# EAGLE board AS726x Spectral Sensor Panel (EAGLE 7.7.0), part 1 of 2
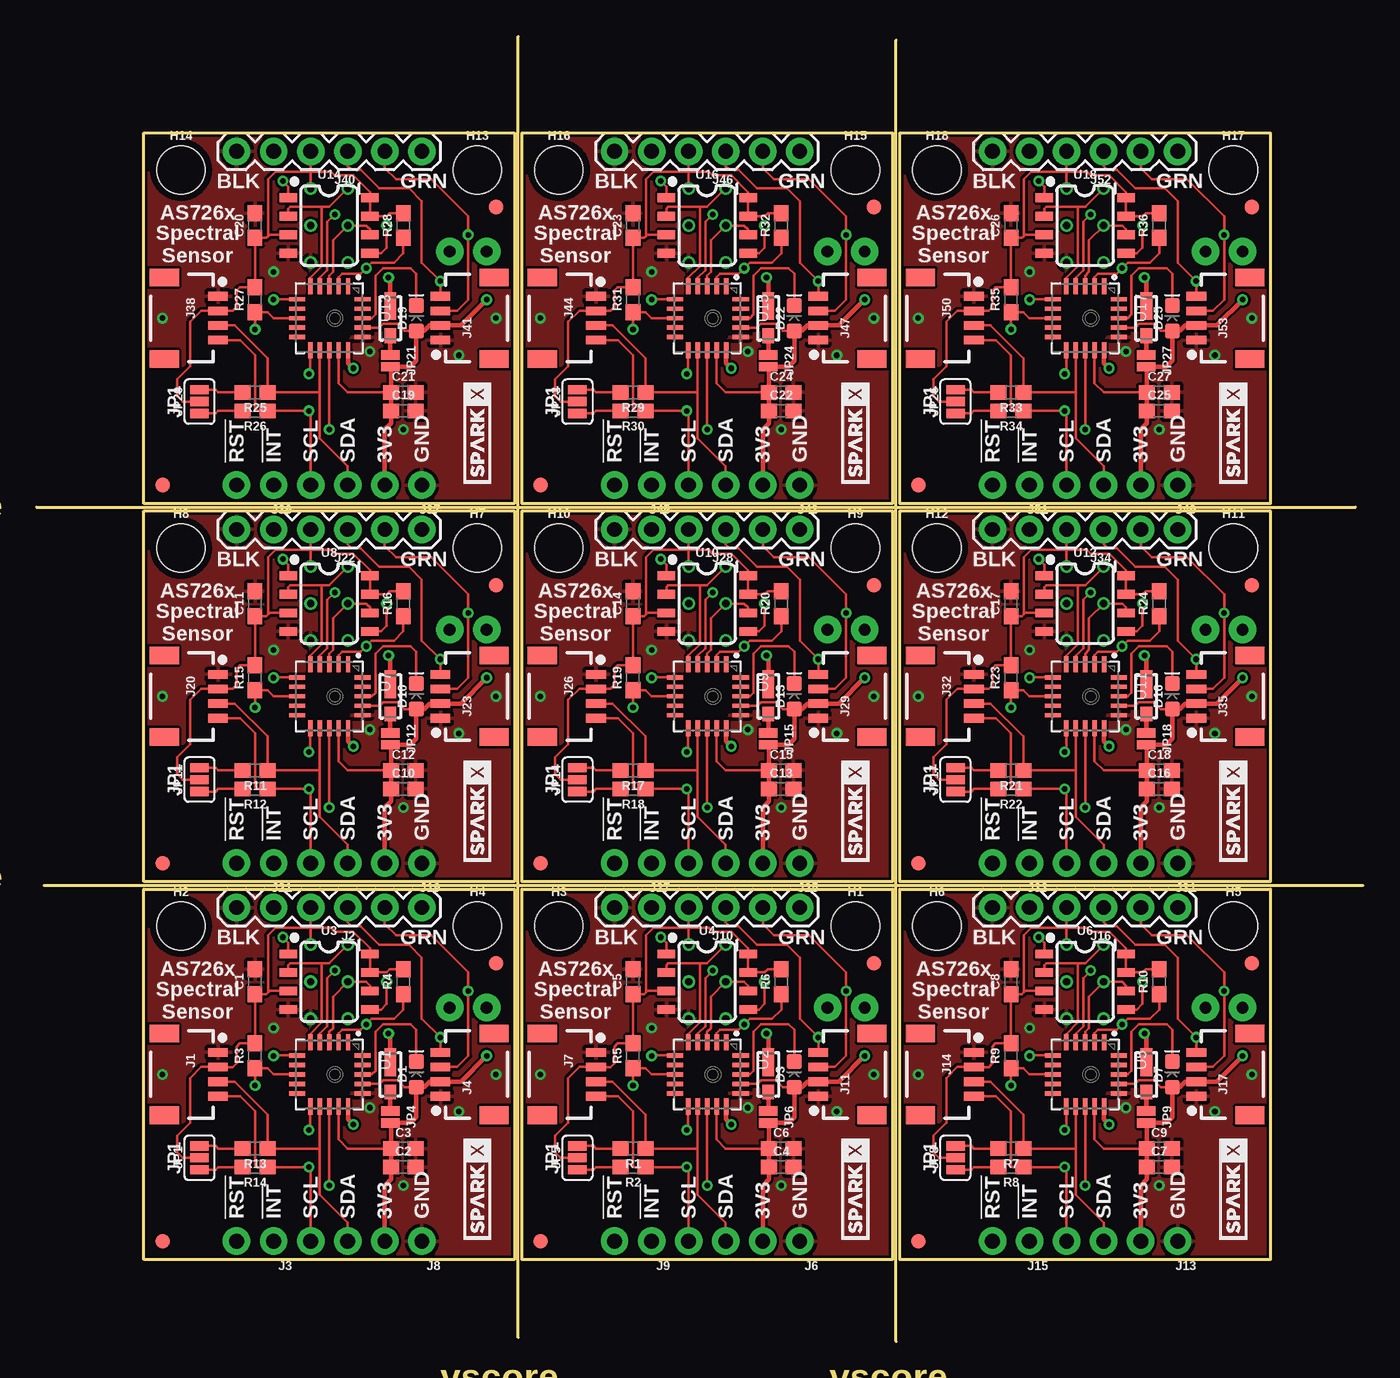
[diagram p0: board, top side]
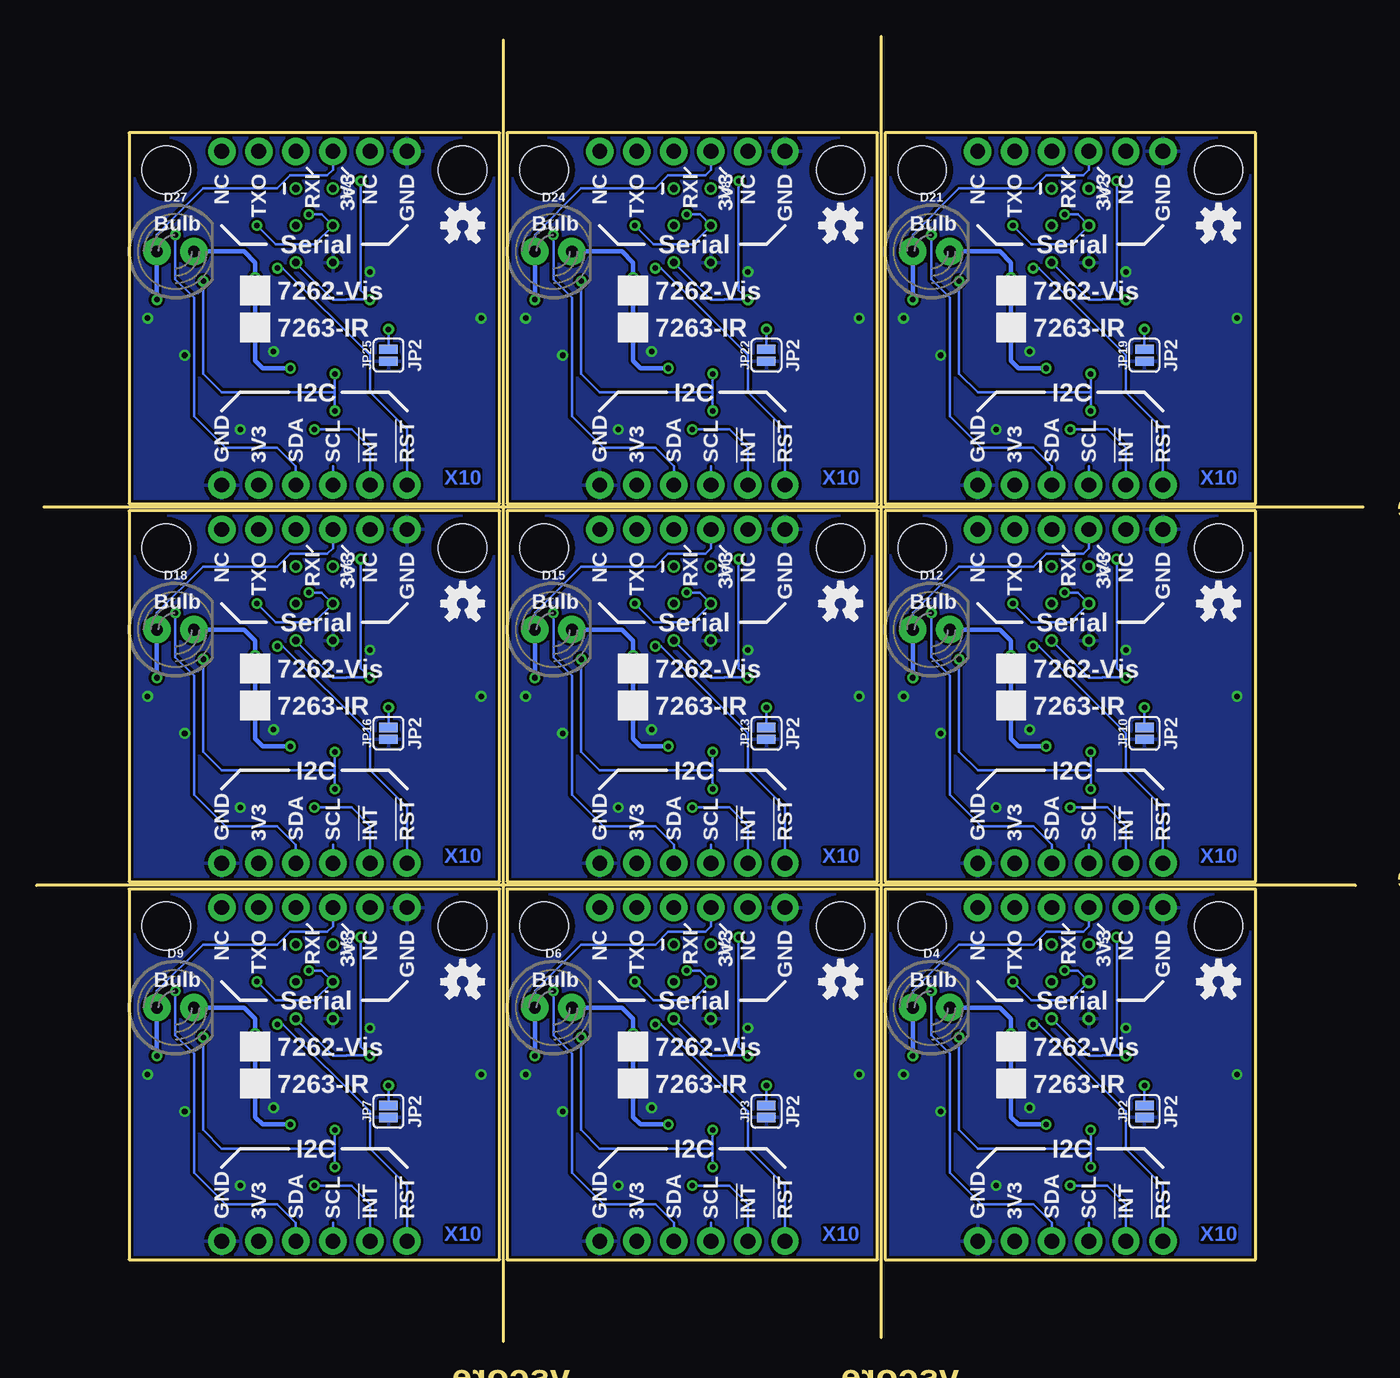
[diagram p1: board, bottom side, seen from below]

Size 90.93 x 89.41 mm. Coordinates in mm from the lower left corner, seen from the top.
Outline: 0.51,31.24 90.93,31.24
Outline: 33.02,0.25 33.02,89.41
Outline: 58.93,0 58.93,89.15
Outline: 0,57.15 90.42,57.15
Outline: 7.37,5.59 7.37,30.99 32.77,30.99 32.77,5.59 7.37,5.59
Outline: 33.27,5.59 33.27,30.99 58.67,30.99 58.67,5.59 33.27,5.59
Outline: 59.18,5.59 59.18,30.99 84.58,30.99 84.58,5.59 59.18,5.59
Outline: 7.37,31.5 7.37,56.9 32.77,56.9 32.77,31.5 7.37,31.5
Outline: 33.27,31.5 33.27,56.9 58.67,56.9 58.67,31.5 33.27,31.5
Outline: 59.18,31.5 59.18,56.9 84.58,56.9 84.58,31.5 59.18,31.5
Outline: 7.37,57.4 7.37,82.8 32.77,82.8 32.77,57.4 7.37,57.4
Outline: 33.27,57.4 33.27,82.8 58.67,82.8 58.67,57.4 33.27,57.4
Outline: 59.18,57.4 59.18,82.8 84.58,82.8 84.58,57.4 59.18,57.4
Copper layers (1*16): Top 0.035mm / dielectric 1.5mm / Bottom 0.035mm
Design rules "SparkFun-2-layer-TIGHT": minimum track width 7mil, minimum drill 15mil, track to track 7mil, track to pad 7mil, pad to pad 7mil, via to via 7mil, smd to smd 7mil, copper to edge 7mil, drill to drill 7mil, minimum pad ring 7mil, minimum via ring 7mil, stop-mask expansion 4mil, vias tented up to drill 25mil, thermal gap 10mil

## Footprints (pad centres in the part's own frame; a part is rotated, then mirrored left to right if it is on the bottom)
0603 = smd 1.1 x 1: 1 -0.85,0; 2 0.85,0
LED-0603 = smd 1 x 1: A -0.877,0; C 0.877,0
SUPER_BRIGHT_SMD_LED_1206 = smd 1 x 0.8: A -1.2,0 | smd 1.9 x 0.8: C 0.827,0
LED_5MM_NOSILK = drill 0.813 pad 1.88: A -1.27,0; K 1.27,0
FIDUCIAL-1X2 = smd 1 x 1: 1 0,0
STAND-OFF = hole 3.302: 0,0
1X04_1MM_RA = smd 0.6 x 1.35: 1 -1.5,0; 2 -0.5,0; 3 0.5,0; 4 1.5,0 | smd 1.2 x 2: NC1 2.8,-3.675; NC2 -2.8,-3.675
FTDI_BASIC = drill 1.016 pad 1.88: CTS 10.16,0; DTR 0,0; GND 12.7,0; RXI 2.54,0; TXO 5.08,0; VCC 7.62,0
1X02_NO_SILK = drill 1.016 pad 1.88: 1 0,0; 2 2.54,0
2X3_TEST_POINTS = drill 0.508: 1 -2.54,-1.27; 2 -2.54,1.27; 3 0,-1.27; 4 0,1.27; 5 2.54,-1.27; 6 2.54,1.27
1X04_NO_SILK = drill 1.016 pad 1.88: 1 0,0; 2 2.54,0; 3 5.08,0; 4 7.62,0
SMT-JUMPER_3_2-NC_PASTE_SILK = smd 0.635 x 1.27: 1 -0.813,0; 2 0,0; 3 0.813,0
SMT-JUMPER_2_NO_SILK = smd 0.635 x 1.27: 1 -0.406,0; 2 0.406,0
SMT-JUMPER_2_NC_PASTE_NO-SILK = smd 0.635 x 1.27: 1 -0.406,0; 2 0.406,0
LGA20 = smd 1.1 x 0.3: 1 -2.2,1.3; 2 -2.2,0.65; 3 -2.2,0; 4 -2.2,-0.65; 5 -2.2,-1.3; 11 2.2,-1.3; 12 2.2,-0.65; 13 2.2,0; 14 2.2,0.65; 15 2.2,1.3 | smd 0.3 x 1.1: 6 -1.3,-2.2; 7 -0.65,-2.2; 8 0,-2.2; 9 0.65,-2.2; 10 1.3,-2.2; 16 1.3,2.3; 17 0.65,2.3; 18 0,2.3; 19 -0.65,2.3; 20 -1.3,2.3
SO08 = smd 0.6 x 1.2: 1 -1.905,-2.8; 2 -0.635,-2.8; 3 0.635,-2.8; 4 1.905,-2.8; 5 1.905,2.8; 6 0.635,2.8; 7 -0.635,2.8; 8 -1.905,2.8

## Placement (x,y rotation side)
C1  1.0uF  [0603]  14.99,24.64 90 top
C2  1.0uF  [0603]  25.15,11.94 0 top
C3  10uF  [0603]  25.15,13.21 0 top
C4  1.0uF  [0603]  51.05,11.94 0 top
C5  1.0uF  [0603]  40.89,24.64 90 top
C6  10uF  [0603]  51.05,13.21 0 top
C7  1.0uF  [0603]  76.96,11.94 0 top
C8  1.0uF  [0603]  66.8,24.64 90 top
C9  10uF  [0603]  76.96,13.21 0 top
C10  1.0uF  [0603]  25.15,37.85 0 top
C11  1.0uF  [0603]  14.99,50.55 90 top
C12  10uF  [0603]  25.15,39.12 0 top
C13  1.0uF  [0603]  51.05,37.85 0 top
C14  1.0uF  [0603]  40.89,50.55 90 top
C15  10uF  [0603]  51.05,39.12 0 top
C16  1.0uF  [0603]  76.96,37.85 0 top
C17  1.0uF  [0603]  66.8,50.55 90 top
C18  10uF  [0603]  76.96,39.12 0 top
C19  1.0uF  [0603]  25.15,63.75 0 top
C20  1.0uF  [0603]  14.99,76.45 90 top
C21  10uF  [0603]  25.15,65.02 0 top
C22  1.0uF  [0603]  51.05,63.75 0 top
C23  1.0uF  [0603]  40.89,76.45 90 top
C24  10uF  [0603]  51.05,65.02 0 top
C25  1.0uF  [0603]  76.96,63.75 0 top
C26  1.0uF  [0603]  66.8,76.45 90 top
C27  10uF  [0603]  76.96,65.02 0 top
D1  BLUE  [LED-0603]  26.04,18.29 90 top
D2  5700k  [SUPER_BRIGHT_SMD_LED_1206]  24.26,18.29 90 top
D3  BLUE  [LED-0603]  51.94,18.29 90 top
D4  Incandescent  [LED_5MM_NOSILK]  29.59,22.86 0 bottom
D5  5700k  [SUPER_BRIGHT_SMD_LED_1206]  50.16,18.29 90 top
D6  Incandescent  [LED_5MM_NOSILK]  55.5,22.86 0 bottom
D7  BLUE  [LED-0603]  77.85,18.29 90 top
D8  5700k  [SUPER_BRIGHT_SMD_LED_1206]  76.07,18.29 90 top
D9  Incandescent  [LED_5MM_NOSILK]  81.41,22.86 0 bottom
D10  BLUE  [LED-0603]  26.04,44.2 90 top
D11  5700k  [SUPER_BRIGHT_SMD_LED_1206]  24.26,44.2 90 top
D12  Incandescent  [LED_5MM_NOSILK]  29.59,48.77 0 bottom
D13  BLUE  [LED-0603]  51.94,44.2 90 top
D14  5700k  [SUPER_BRIGHT_SMD_LED_1206]  50.16,44.2 90 top
D15  Incandescent  [LED_5MM_NOSILK]  55.5,48.77 0 bottom
D16  BLUE  [LED-0603]  77.85,44.2 90 top
D17  5700k  [SUPER_BRIGHT_SMD_LED_1206]  76.07,44.2 90 top
D18  Incandescent  [LED_5MM_NOSILK]  81.41,48.77 0 bottom
D19  BLUE  [LED-0603]  26.04,70.1 90 top
D20  5700k  [SUPER_BRIGHT_SMD_LED_1206]  24.26,70.1 90 top
D21  Incandescent  [LED_5MM_NOSILK]  29.59,74.68 0 bottom
D22  BLUE  [LED-0603]  51.94,70.1 90 top
D23  5700k  [SUPER_BRIGHT_SMD_LED_1206]  50.16,70.1 90 top
D24  Incandescent  [LED_5MM_NOSILK]  55.5,74.68 0 bottom
D25  BLUE  [LED-0603]  77.85,70.1 90 top
D26  5700k  [SUPER_BRIGHT_SMD_LED_1206]  76.07,70.1 90 top
D27  Incandescent  [LED_5MM_NOSILK]  81.41,74.68 0 bottom
FD1  FIDUCIAL1X2  [FIDUCIAL-1X2]  8.64,6.86 0 top
FD2  FIDUCIAL1X2  [FIDUCIAL-1X2]  31.5,25.91 0 top
FD3  FIDUCIAL1X2  [FIDUCIAL-1X2]  34.54,6.86 0 top
FD4  FIDUCIAL1X2  [FIDUCIAL-1X2]  57.4,25.91 0 top
FD5  FIDUCIAL1X2  [FIDUCIAL-1X2]  60.45,6.86 0 top
FD6  FIDUCIAL1X2  [FIDUCIAL-1X2]  83.31,25.91 0 top
FD7  FIDUCIAL1X2  [FIDUCIAL-1X2]  8.64,32.77 0 top
FD8  FIDUCIAL1X2  [FIDUCIAL-1X2]  31.5,51.82 0 top
FD9  FIDUCIAL1X2  [FIDUCIAL-1X2]  34.54,32.77 0 top
FD10  FIDUCIAL1X2  [FIDUCIAL-1X2]  57.4,51.82 0 top
FD11  FIDUCIAL1X2  [FIDUCIAL-1X2]  60.45,32.77 0 top
FD12  FIDUCIAL1X2  [FIDUCIAL-1X2]  83.31,51.82 0 top
FD13  FIDUCIAL1X2  [FIDUCIAL-1X2]  8.64,58.67 0 top
FD14  FIDUCIAL1X2  [FIDUCIAL-1X2]  31.5,77.72 0 top
FD15  FIDUCIAL1X2  [FIDUCIAL-1X2]  34.54,58.67 0 top
FD16  FIDUCIAL1X2  [FIDUCIAL-1X2]  57.4,77.72 0 top
FD17  FIDUCIAL1X2  [FIDUCIAL-1X2]  60.45,58.67 0 top
FD18  FIDUCIAL1X2  [FIDUCIAL-1X2]  83.31,77.72 0 top
H1  STAND-OFF  [STAND-OFF]  56.13,28.45 0 top
H2  STAND-OFF  [STAND-OFF]  9.91,28.45 0 top
H3  STAND-OFF  [STAND-OFF]  35.81,28.45 0 top
H4  STAND-OFF  [STAND-OFF]  30.23,28.45 0 top
H5  STAND-OFF  [STAND-OFF]  82.04,28.45 0 top
H6  STAND-OFF  [STAND-OFF]  61.72,28.45 0 top
H7  STAND-OFF  [STAND-OFF]  30.23,54.36 0 top
H8  STAND-OFF  [STAND-OFF]  9.91,54.36 0 top
H9  STAND-OFF  [STAND-OFF]  56.13,54.36 0 top
H10  STAND-OFF  [STAND-OFF]  35.81,54.36 0 top
H11  STAND-OFF  [STAND-OFF]  82.04,54.36 0 top
H12  STAND-OFF  [STAND-OFF]  61.72,54.36 0 top
H13  STAND-OFF  [STAND-OFF]  30.23,80.26 0 top
H14  STAND-OFF  [STAND-OFF]  9.91,80.26 0 top
H15  STAND-OFF  [STAND-OFF]  56.13,80.26 0 top
H16  STAND-OFF  [STAND-OFF]  35.81,80.26 0 top
H17  STAND-OFF  [STAND-OFF]  82.04,80.26 0 top
H18  STAND-OFF  [STAND-OFF]  61.72,80.26 0 top
J1  [1X04_1MM_RA]  12.45,18.29 270 top
J2  Serial Interface  [FTDI_BASIC]  26.42,29.72 180 top
J3  [1X02_NO_SILK]  16.26,6.86 180 top
J4  [1X04_1MM_RA]  27.69,18.29 90 top
J5  Flash Programming  [2X3_TEST_POINTS]  20.07,24.64 270 bottom
J6  [1X04_NO_SILK]  52.32,6.86 180 top
J7  [1X04_1MM_RA]  38.35,18.29 270 top
J8  [1X04_NO_SILK]  26.42,6.86 180 top
J9  [1X02_NO_SILK]  42.16,6.86 180 top
J10  Serial Interface  [FTDI_BASIC]  52.32,29.72 180 top
J11  [1X04_1MM_RA]  53.59,18.29 90 top
J12  Flash Programming  [2X3_TEST_POINTS]  45.97,24.64 270 bottom
J13  [1X04_NO_SILK]  78.23,6.86 180 top
J14  [1X04_1MM_RA]  64.26,18.29 270 top
J15  [1X02_NO_SILK]  68.07,6.86 180 top
J16  Serial Interface  [FTDI_BASIC]  78.23,29.72 180 top
J17  [1X04_1MM_RA]  79.5,18.29 90 top
J18  Flash Programming  [2X3_TEST_POINTS]  71.88,24.64 270 bottom
J19  [1X04_NO_SILK]  26.42,32.77 180 top
J20  [1X04_1MM_RA]  12.45,44.2 270 top
J21  [1X02_NO_SILK]  16.26,32.77 180 top
J22  Serial Interface  [FTDI_BASIC]  26.42,55.63 180 top
J23  [1X04_1MM_RA]  27.69,44.2 90 top
J24  Flash Programming  [2X3_TEST_POINTS]  20.07,50.55 270 bottom
J25  [1X04_NO_SILK]  52.32,32.77 180 top
J26  [1X04_1MM_RA]  38.35,44.2 270 top
J27  [1X02_NO_SILK]  42.16,32.77 180 top
J28  Serial Interface  [FTDI_BASIC]  52.32,55.63 180 top
J29  [1X04_1MM_RA]  53.59,44.2 90 top
J30  Flash Programming  [2X3_TEST_POINTS]  45.97,50.55 270 bottom
J31  [1X04_NO_SILK]  78.23,32.77 180 top
J32  [1X04_1MM_RA]  64.26,44.2 270 top
J33  [1X02_NO_SILK]  68.07,32.77 180 top
J34  Serial Interface  [FTDI_BASIC]  78.23,55.63 180 top
J35  [1X04_1MM_RA]  79.5,44.2 90 top
J36  Flash Programming  [2X3_TEST_POINTS]  71.88,50.55 270 bottom
J37  [1X04_NO_SILK]  26.42,58.67 180 top
J38  [1X04_1MM_RA]  12.45,70.1 270 top
J39  [1X02_NO_SILK]  16.26,58.67 180 top
J40  Serial Interface  [FTDI_BASIC]  26.42,81.53 180 top
J41  [1X04_1MM_RA]  27.69,70.1 90 top
J42  Flash Programming  [2X3_TEST_POINTS]  20.07,76.45 270 bottom
J43  [1X04_NO_SILK]  52.32,58.67 180 top
J44  [1X04_1MM_RA]  38.35,70.1 270 top
J45  [1X02_NO_SILK]  42.16,58.67 180 top
J46  Serial Interface  [FTDI_BASIC]  52.32,81.53 180 top
J47  [1X04_1MM_RA]  53.59,70.1 90 top
J48  Flash Programming  [2X3_TEST_POINTS]  45.97,76.45 270 bottom
J49  [1X04_NO_SILK]  78.23,58.67 180 top
J50  [1X04_1MM_RA]  64.26,70.1 270 top
J51  [1X02_NO_SILK]  68.07,58.67 180 top
J52  Serial Interface  [FTDI_BASIC]  78.23,81.53 180 top
J53  [1X04_1MM_RA]  79.5,70.1 90 top
J54  Flash Programming  [2X3_TEST_POINTS]  71.88,76.45 270 bottom
JP1  [SMT-JUMPER_3_2-NC_PASTE_SILK]  11.18,12.57 90 top
JP2  [SMT-JUMPER_2_NO_SILK]  14.99,15.75 90 bottom
JP3  [SMT-JUMPER_2_NO_SILK]  40.89,15.75 90 bottom
JP4  [SMT-JUMPER_2_NC_PASTE_NO-SILK]  24.26,15.37 270 top
JP5  [SMT-JUMPER_3_2-NC_PASTE_SILK]  37.08,12.57 90 top
JP6  [SMT-JUMPER_2_NC_PASTE_NO-SILK]  50.16,15.37 270 top
JP7  [SMT-JUMPER_2_NO_SILK]  66.8,15.75 90 bottom
JP8  [SMT-JUMPER_3_2-NC_PASTE_SILK]  62.99,12.57 90 top
JP9  [SMT-JUMPER_2_NC_PASTE_NO-SILK]  76.07,15.37 270 top
JP10  [SMT-JUMPER_2_NO_SILK]  14.99,41.66 90 bottom
JP11  [SMT-JUMPER_3_2-NC_PASTE_SILK]  11.18,38.48 90 top
JP12  [SMT-JUMPER_2_NC_PASTE_NO-SILK]  24.26,41.27 270 top
JP13  [SMT-JUMPER_2_NO_SILK]  40.89,41.66 90 bottom
JP14  [SMT-JUMPER_3_2-NC_PASTE_SILK]  37.08,38.48 90 top
JP15  [SMT-JUMPER_2_NC_PASTE_NO-SILK]  50.16,41.27 270 top
JP16  [SMT-JUMPER_2_NO_SILK]  66.8,41.66 90 bottom
JP17  [SMT-JUMPER_3_2-NC_PASTE_SILK]  62.99,38.48 90 top
JP18  [SMT-JUMPER_2_NC_PASTE_NO-SILK]  76.07,41.27 270 top
JP19  [SMT-JUMPER_2_NO_SILK]  14.99,67.56 90 bottom
JP20  [SMT-JUMPER_3_2-NC_PASTE_SILK]  11.18,64.39 90 top
JP21  [SMT-JUMPER_2_NC_PASTE_NO-SILK]  24.26,67.18 270 top
JP22  [SMT-JUMPER_2_NO_SILK]  40.89,67.56 90 bottom
JP23  [SMT-JUMPER_3_2-NC_PASTE_SILK]  37.08,64.39 90 top
JP24  [SMT-JUMPER_2_NC_PASTE_NO-SILK]  50.16,67.18 270 top
JP25  [SMT-JUMPER_2_NO_SILK]  66.8,67.56 90 bottom
JP26  [SMT-JUMPER_3_2-NC_PASTE_SILK]  62.99,64.39 90 top
JP27  [SMT-JUMPER_2_NC_PASTE_NO-SILK]  76.07,67.18 270 top
LOGO1  OSHW-LOGOS  [OSHW-LOGO-S]  35.81,24.64 0 bottom
LOGO2  OSHW-LOGOS  [OSHW-LOGO-S]  61.72,24.64 0 bottom
LOGO3  OSHW-LOGOS  [OSHW-LOGO-S]  9.91,50.55 0 bottom
LOGO4  OSHW-LOGOS  [OSHW-LOGO-S]  9.91,24.64 0 bottom
LOGO5  OSHW-LOGOS  [OSHW-LOGO-S]  35.81,50.55 0 bottom
LOGO6  OSHW-LOGOS  [OSHW-LOGO-S]  61.72,50.55 0 bottom
LOGO7  OSHW-LOGOS  [OSHW-LOGO-S]  9.91,76.45 0 bottom
LOGO8  OSHW-LOGOS  [OSHW-LOGO-S]  35.81,76.45 0 bottom
LOGO9  OSHW-LOGOS  [OSHW-LOGO-S]  61.72,76.45 0 bottom
R1  4.7k  [0603]  40.89,13.21 180 top
R2  4.7k  [0603]  40.89,11.94 180 top
R3  10k  [0603]  14.99,19.56 90 top
R4  10k  [0603]  25.15,24.64 90 top
R5  10k  [0603]  40.89,19.56 90 top
R6  10k  [0603]  51.05,24.64 90 top
R7  4.7k  [0603]  66.8,13.21 180 top
R8  4.7k  [0603]  66.8,11.94 180 top
R9  10k  [0603]  66.8,19.56 90 top
R10  10k  [0603]  76.96,24.64 90 top
R11  4.7k  [0603]  14.99,39.12 180 top
R12  4.7k  [0603]  14.99,37.85 180 top
R13  4.7k  [0603]  14.99,13.21 180 top
R14  4.7k  [0603]  14.99,11.94 180 top
R15  10k  [0603]  14.99,45.47 90 top
R16  10k  [0603]  25.15,50.55 90 top
R17  4.7k  [0603]  40.89,39.12 180 top
R18  4.7k  [0603]  40.89,37.85 180 top
R19  10k  [0603]  40.89,45.47 90 top
R20  10k  [0603]  51.05,50.55 90 top
R21  4.7k  [0603]  66.8,39.12 180 top
R22  4.7k  [0603]  66.8,37.85 180 top
R23  10k  [0603]  66.8,45.47 90 top
R24  10k  [0603]  76.96,50.55 90 top
R25  4.7k  [0603]  14.99,65.02 180 top
R26  4.7k  [0603]  14.99,63.75 180 top
R27  10k  [0603]  14.99,71.37 90 top
R28  10k  [0603]  25.15,76.45 90 top
R29  4.7k  [0603]  40.89,65.02 180 top
R30  4.7k  [0603]  40.89,63.75 180 top
R31  10k  [0603]  40.89,71.37 90 top
R32  10k  [0603]  51.05,76.45 90 top
R33  4.7k  [0603]  66.8,65.02 180 top
R34  4.7k  [0603]  66.8,63.75 180 top
R35  10k  [0603]  66.8,71.37 90 top
R36  10k  [0603]  76.96,76.45 90 top
U1  AS726X  [LGA20]  20.07,18.29 270 top
U2  AS726X  [LGA20]  45.97,18.29 270 top
U3  4MB Flash  [SO08]  20.07,24.64 270 top
U4  4MB Flash  [SO08]  45.97,24.64 270 top
U5  AS726X  [LGA20]  71.88,18.29 270 top
U6  4MB Flash  [SO08]  71.88,24.64 270 top
U7  AS726X  [LGA20]  20.07,44.2 270 top
U8  4MB Flash  [SO08]  20.07,50.55 270 top
U9  AS726X  [LGA20]  45.97,44.2 270 top
U10  4MB Flash  [SO08]  45.97,50.55 270 top
U11  AS726X  [LGA20]  71.88,44.2 270 top
U12  4MB Flash  [SO08]  71.88,50.55 270 top
U13  AS726X  [LGA20]  20.07,70.1 270 top
U14  4MB Flash  [SO08]  20.07,76.45 270 top
U15  AS726X  [LGA20]  45.97,70.1 270 top
U16  4MB Flash  [SO08]  45.97,76.45 270 top
U17  AS726X  [LGA20]  71.88,70.1 270 top
U18  4MB Flash  [SO08]  71.88,76.45 270 top
U$1  SPARKX-LOGO3  [SPARKX-SMALL]  30.23,10.41 90 top
U$2  SPARKX-LOGO3  [SPARKX-SMALL]  56.13,10.41 90 top
U$3  SPARKX-LOGO3  [SPARKX-SMALL]  82.04,10.41 90 top
U$4  SPARKX-LOGO3  [SPARKX-SMALL]  30.23,36.32 90 top
U$5  SPARKX-LOGO3  [SPARKX-SMALL]  56.13,36.32 90 top
U$6  SPARKX-LOGO3  [SPARKX-SMALL]  82.04,36.32 90 top
U$7  SPARKX-LOGO3  [SPARKX-SMALL]  30.23,62.23 90 top
U$8  SPARKX-LOGO3  [SPARKX-SMALL]  56.13,62.23 90 top
U$9  SPARKX-LOGO3  [SPARKX-SMALL]  82.04,62.23 90 top

## Library data of the parts
C1 C2 C4 C5 C7 C8 C10 C11 C13 C14 C16 C17 C19 C20 C22 C23 C25 C26 = SparkFun-Capacitors; PROD_ID: CAP-00868
C3 C6 C9 C12 C15 C18 C21 C24 C27 = SparkFun-Capacitors; PROD_ID: CAP-11015
D1 D3 D7 D10 D13 D16 D19 D22 D25 = SparkFun-LED; PROD_ID: DIO-08575
D2 D4-D6 D8 D9 D11 D12 D14 D15 D17 D18 D20 D21 D23 D24 D26 D27 J1 J4 J7 J11 J14 J17 J20 J23 J26 J29 J32 J35 J38 J41 J44 J47 J50 J53 U1 U2 U5 U7 U9 U11 U13 U15 U17 U$1-U$9 = SparkX
FD1-FD18 LOGO1-LOGO9 = SparkFun-Aesthetics
H1-H18 = SparkFun-Hardware
J2 J3 J5 J6 J8-J10 J12 J13 J15 J16 J18 J19 J21 J22 J24 J25 J27 J28 J30 J31 J33 J34 J36 J37 J39 J40 J42 J43 J45 J46 J48 J49 J51 J52 J54 = SparkFun-Connectors
JP1-JP27 = SparkFun-Jumpers
R1 R2 R7 R8 R11-R14 R17 R18 R21 R22 R25 R26 R29 R30 R33 R34 = SparkFun-Resistors; PROD_ID: RES-07857
R3-R6 R9 R10 R15 R16 R19 R20 R23 R24 R27 R28 R31 R32 R35 R36 = SparkFun-Resistors; PROD_ID: RES-00824
U3 U4 U6 U8 U10 U12 U14 U16 U18 = SparkFun-IC-Memory; PROD_ID: IC-12455

## Nets
3.3V: C1.1 C2.1 C3.1 D1.A D4.A J1.2 J2.VCC J4.2 J5.2 J8.2 JP1.2 JP4.2 R3.2 R4.2 U1.14 U1.17 U3.3 U3.7 U3.8
3.3V1: C4.1 C5.1 C6.1 D3.A D6.A J6.2 J7.2 J10.VCC J11.2 J12.2 JP5.2 JP6.2 R5.2 R6.2 U2.14 U2.17 U4.3 U4.7 U4.8
3.3V2: C7.1 C8.1 C9.1 D7.A D9.A J13.2 J14.2 J16.VCC J17.2 J18.2 JP8.2 JP9.2 R9.2 R10.2 U5.14 U5.17 U6.3 U6.7 U6.8
3.3V3: C10.1 C11.1 C12.1 D10.A D12.A J19.2 J20.2 J22.VCC J23.2 J24.2 JP11.2 JP12.2 R15.2 R16.2 U7.14 U7.17 U8.3 U8.7 U8.8
3.3V4: C13.1 C14.1 C15.1 D13.A D15.A J25.2 J26.2 J28.VCC J29.2 J30.2 JP14.2 JP15.2 R19.2 R20.2 U9.14 U9.17 U10.3 U10.7 U10.8
3.3V5: C16.1 C17.1 C18.1 D16.A D18.A J31.2 J32.2 J34.VCC J35.2 J36.2 JP17.2 JP18.2 R23.2 R24.2 U11.14 U11.17 U12.3 U12.7 U12.8
3.3V6: C19.1 C20.1 C21.1 D19.A D21.A J37.2 J38.2 J40.VCC J41.2 J42.2 JP20.2 JP21.2 R27.2 R28.2 U13.14 U13.17 U14.3 U14.7 U14.8
3.3V7: C22.1 C23.1 C24.1 D22.A D24.A J43.2 J44.2 J46.VCC J47.2 J48.2 JP23.2 JP24.2 R31.2 R32.2 U15.14 U15.17 U16.3 U16.7 U16.8
3.3V8: C25.1 C26.1 C27.1 D25.A D27.A J49.2 J50.2 J52.VCC J53.2 J54.2 JP26.2 JP27.2 R35.2 R36.2 U17.14 U17.17 U18.3 U18.7 U18.8
!CS_EE: J5.5 U1.6 U3.1
!CS_EE1: J12.5 U2.6 U4.1
!CS_EE2: J18.5 U5.6 U6.1
!CS_EE3: J24.5 U7.6 U8.1
!CS_EE4: J30.5 U9.6 U10.1
!CS_EE5: J36.5 U11.6 U12.1
!CS_EE6: J42.5 U13.6 U14.1
!CS_EE7: J48.5 U15.6 U16.1
!CS_EE8: J54.5 U17.6 U18.1
!INT: J3.1 U1.13
!INT1: J9.1 U2.13
!INT2: J15.1 U5.13
!INT3: J21.1 U7.13
!INT4: J27.1 U9.13
!INT5: J33.1 U11.13
!INT6: J39.1 U13.13
!INT7: J45.1 U15.13
!INT8: J51.1 U17.13
!RST: J3.2 R4.1 U1.2
!RST1: J9.2 R6.1 U2.2
!RST2: J15.2 R10.1 U5.2
!RST3: J21.2 R16.1 U7.2
!RST4: J27.2 R20.1 U9.2
!RST5: J33.2 R24.1 U11.2
!RST6: J39.2 R28.1 U13.2
!RST7: J45.2 R32.1 U15.2
!RST8: J51.2 R36.1 U17.2
GND: C1.2 C2.2 C3.2 J1.1 J2.GND J4.1 J5.6 J8.1 JP2.1 U1.16 U3.4
GND1: C4.2 C5.2 C6.2 J6.1 J7.1 J10.GND J11.1 J12.6 JP3.1 U2.16 U4.4
GND2: C7.2 C8.2 C9.2 J13.1 J14.1 J16.GND J17.1 J18.6 JP7.1 U5.16 U6.4
GND3: C10.2 C11.2 C12.2 J19.1 J20.1 J22.GND J23.1 J24.6 JP10.1 U7.16 U8.4
GND4: C13.2 C14.2 C15.2 J25.1 J26.1 J28.GND J29.1 J30.6 JP13.1 U9.16 U10.4
GND5: C16.2 C17.2 C18.2 J31.1 J32.1 J34.GND J35.1 J36.6 JP16.1 U11.16 U12.4
GND6: C19.2 C20.2 C21.2 J37.1 J38.1 J40.GND J41.1 J42.6 JP19.1 U13.16 U14.4
GND7: C22.2 C23.2 C24.2 J43.1 J44.1 J46.GND J47.1 J48.6 JP22.1 U15.16 U16.4
GND8: C25.2 C26.2 C27.2 J49.1 J50.1 J52.GND J53.1 J54.6 JP25.1 U17.16 U18.4
LED_DRV: D2.C D4.K U1.15
LED_DRV1: D5.C D6.K U2.15
LED_DRV2: D8.C D9.K U5.15
LED_DRV3: D11.C D12.K U7.15
LED_DRV4: D14.C D15.K U9.15
LED_DRV5: D17.C D18.K U11.15
LED_DRV6: D20.C D21.K U13.15
LED_DRV7: D23.C D24.K U15.15
LED_DRV8: D26.C D27.K U17.15
MISO: J5.1 U1.5 U3.2
MISO1: J12.1 U2.5 U4.2
MISO2: J18.1 U5.5 U6.2
MISO3: J24.1 U7.5 U8.2
MISO4: J30.1 U9.5 U10.2
MISO5: J36.1 U11.5 U12.2
MISO6: J42.1 U13.5 U14.2
MISO7: J48.1 U15.5 U16.2
MISO8: J54.1 U17.5 U18.2
MOSI: J5.4 U1.4 U3.5
MOSI1: J12.4 U2.4 U4.5
MOSI2: J18.4 U5.4 U6.5
MOSI3: J24.4 U7.4 U8.5
MOSI4: J30.4 U9.4 U10.5
MOSI5: J36.4 U11.4 U12.5
MOSI6: J42.4 U13.4 U14.5
MOSI7: J48.4 U15.4 U16.5
MOSI8: J54.4 U17.4 U18.5
N$1: JP2.2 R3.1 U1.8
N$2: D1.C U1.18
N$3: JP5.3 R1.2
N$4: JP1.3 R13.2
N$5: JP1.1 R14.2
N$6: D2.A JP4.1
N$7: JP5.1 R2.2
N$8: JP3.2 R5.1 U2.8
N$9: D3.C U2.18
N$10: D5.A JP6.1
N$11: JP8.3 R7.2
N$12: JP8.1 R8.2
N$13: JP7.2 R9.1 U5.8
N$14: D7.C U5.18
N$15: D8.A JP9.1
N$16: JP11.3 R11.2
N$17: JP11.1 R12.2
N$18: JP10.2 R15.1 U7.8
N$19: D10.C U7.18
N$20: D11.A JP12.1
N$21: JP14.3 R17.2
N$22: JP14.1 R18.2
N$23: JP13.2 R19.1 U9.8
N$24: D13.C U9.18
N$25: D14.A JP15.1
N$26: JP17.3 R21.2
N$27: JP17.1 R22.2
N$28: JP16.2 R23.1 U11.8
N$29: D16.C U11.18
N$30: D17.A JP18.1
N$31: JP20.3 R25.2
N$32: JP20.1 R26.2
N$33: JP19.2 R27.1 U13.8
N$34: D19.C U13.18
N$35: D20.A JP21.1
N$36: JP23.3 R29.2
N$37: JP23.1 R30.2
N$38: JP22.2 R31.1 U15.8
N$39: D22.C U15.18
N$40: D23.A JP24.1
N$41: JP26.3 R33.2
N$42: JP26.1 R34.2
N$43: JP25.2 R35.1 U17.8
N$44: D25.C U17.18
N$45: D26.A JP27.1
RX/SCL: J1.4 J2.TXO J4.4 J8.4 R14.1 U1.11
RX/SCL1: J6.4 J7.4 J10.TXO J11.4 R2.1 U2.11
RX/SCL2: J13.4 J14.4 J16.TXO J17.4 R8.1 U5.11
RX/SCL3: J19.4 J20.4 J22.TXO J23.4 R12.1 U7.11
RX/SCL4: J25.4 J26.4 J28.TXO J29.4 R18.1 U9.11
RX/SCL5: J31.4 J32.4 J34.TXO J35.4 R22.1 U11.11
RX/SCL6: J37.4 J38.4 J40.TXO J41.4 R26.1 U13.11
RX/SCL7: J43.4 J44.4 J46.TXO J47.4 R30.1 U15.11
RX/SCL8: J49.4 J50.4 J52.TXO J53.4 R34.1 U17.11
SCK: J5.3 U1.3 U3.6
SCK1: J12.3 U2.3 U4.6
SCK2: J18.3 U5.3 U6.6
SCK3: J24.3 U7.3 U8.6
SCK4: J30.3 U9.3 U10.6
SCK5: J36.3 U11.3 U12.6
SCK6: J42.3 U13.3 U14.6
SCK7: J48.3 U15.3 U16.6
SCK8: J54.3 U17.3 U18.6
TX/SDA: J1.3 J2.RXI J4.3 J8.3 R13.1 U1.12
TX/SDA1: J6.3 J7.3 J10.RXI J11.3 R1.1 U2.12
TX/SDA2: J13.3 J14.3 J16.RXI J17.3 R7.1 U5.12
TX/SDA3: J19.3 J20.3 J22.RXI J23.3 R11.1 U7.12
TX/SDA4: J25.3 J26.3 J28.RXI J29.3 R17.1 U9.12
TX/SDA5: J31.3 J32.3 J34.RXI J35.3 R21.1 U11.12
TX/SDA6: J37.3 J38.3 J40.RXI J41.3 R25.1 U13.12
TX/SDA7: J43.3 J44.3 J46.RXI J47.3 R29.1 U15.12
TX/SDA8: J49.3 J50.3 J52.RXI J53.3 R33.1 U17.12